# EAGLE board iPod-Serial-v14 (EAGLE 7.2.0)
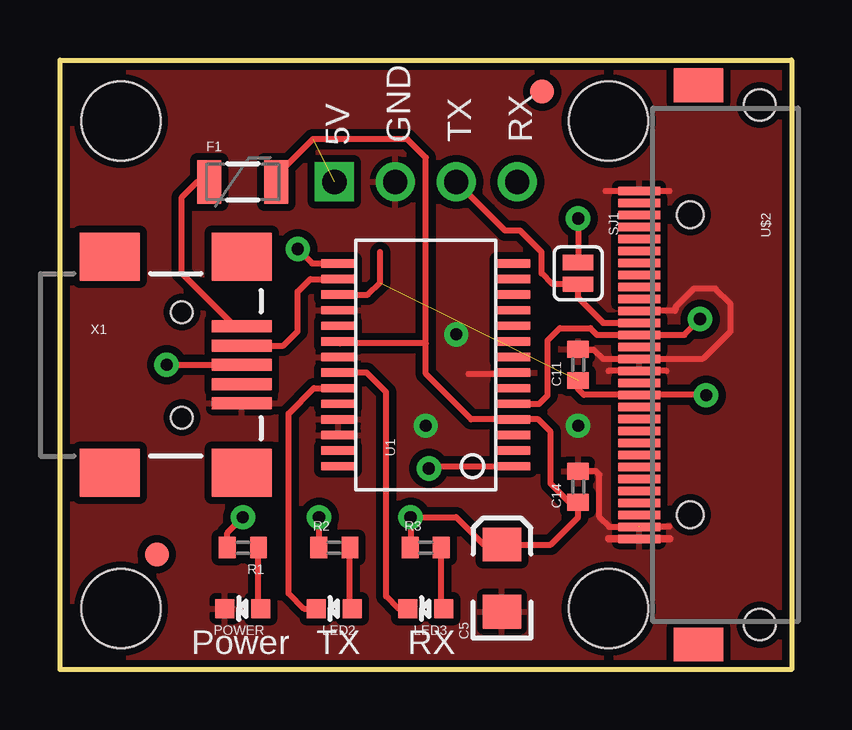
[diagram p0: board, top side]
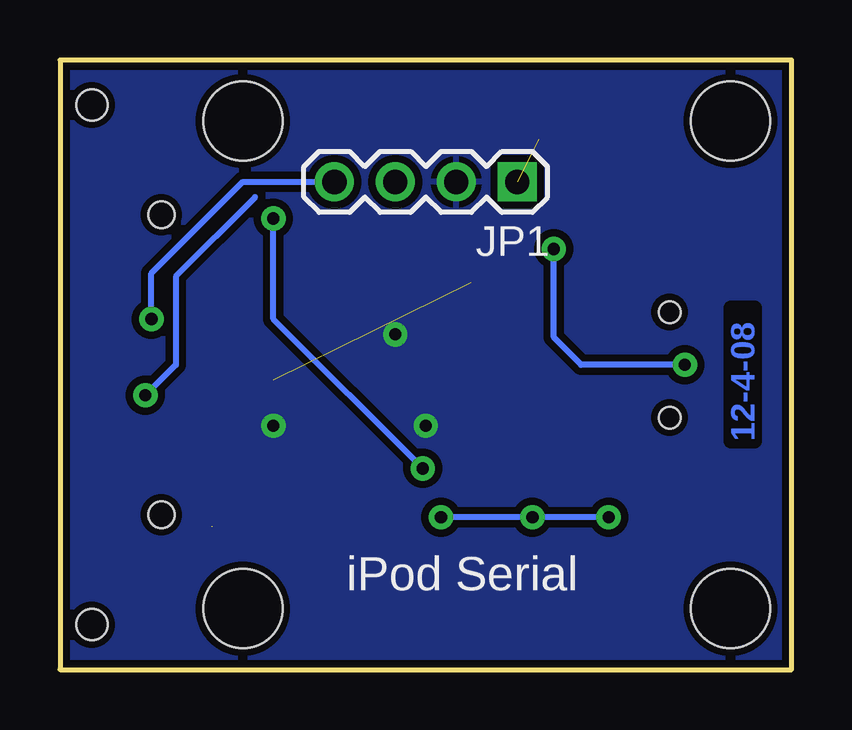
[diagram p1: board, bottom side, seen from below]

Size 30.48 x 25.4 mm. Coordinates in mm from the lower left corner, seen from the top.
Outline: 0,25.4 30.48,25.4 30.48,0 0,0 0,25.4
Copper layers (1*16): Top 0.035mm / dielectric 1.5mm / Bottom 0.035mm
Design rules "SparkFun *": minimum track width 8mil, minimum drill 20mil, track to track 8mil, track to pad 8mil, pad to pad 8mil, via to via 8mil, smd to smd 8mil, copper to edge 10mil, drill to drill 8mil, minimum pad ring 12mil, minimum via ring 10mil, stop-mask expansion 4mil, vias tented up to drill 25mil, thermal gap 10mil
Net classes: 0 default: width 0.203 mm; 1 vcc: width 0.203 mm

## Footprints (pad centres in the part's own frame; a part is rotated, then mirrored left to right if it is on the bottom)
EIA3216 = smd 1.4 x 1.6: A 1.4,0; C -1.4,0
C0402 = smd 0.7 x 0.9: 1 -0.65,0; 2 0.65,0
PTC-1206 = smd 1 x 1.8: 1 -1.4,0; 2 1.4,0
1X04 = drill 1.016 square: 1 0,0 | drill 1.016: 2 2.54,0; 3 5.08,0; 4 7.62,0
LED-0603 = smd 0.8 x 0.8: A 0,-0.75; C 0,0.75
SJ_2S = smd 0.635 x 1.27: 1 -0.45,0; 2 0.45,0
SSOP28DB = smd 0.348 x 1.397: 1 -4.225,-3.656; 2 -3.575,-3.656; 3 -2.925,-3.656; 4 -2.275,-3.656; 5 -1.625,-3.656; 6 -0.975,-3.656; 7 -0.325,-3.656; 8 0.325,-3.656; 9 0.975,-3.656; 10 1.625,-3.656; 11 2.275,-3.656; 12 2.925,-3.656; 13 3.575,-3.656; 14 4.225,-3.656; 15 4.225,3.656; 16 3.575,3.656; 17 2.925,3.656; 18 2.275,3.656; 19 1.625,3.656; 20 0.975,3.656; 21 0.325,3.656; 22 -0.325,3.656; 23 -0.975,3.656; 24 -1.625,3.656; 25 -2.275,3.656; 26 -2.925,3.656; 27 -3.575,3.656; 28 -4.225,3.656
STAND-OFF = hole 3.302: 0,0
IPOD_FEMALE_CONNECTOR = smd 0.35 x 1.75: 1 -7.25,0; 2 -6.75,0; 3 -6.25,0; 4 -5.75,0; 5 -5.25,0; 6 -4.75,0; 7 -4.25,0; 8 -3.75,0; 9 -3.25,0; 10 -2.75,0; 11 -2.25,0; 12 -1.75,0; 13 -1.25,0; 14 -0.75,0; 15 -0.25,0; 16 0.25,0; 17 0.75,0; 18 1.25,0; 19 1.75,0; 20 2.25,0; 21 2.75,0; 22 3.25,0; 23 3.75,0; 24 4.25,0; 25 4.75,0; 26 5.25,0; 27 5.75,0; 28 6.25,0; 29 6.75,0; 30 7.25,0 | smd 1.4 x 2.05: 31 -11.65,2.475; 32 11.65,2.475 | hole 1.1: 6.25,2.125; -6.25,2.125 | hole 1.3: 10.825,5.025; -10.825,5.025
FIDUCIAL-1X2 = smd 1 x 1: 1 0,0
USB-MINIB = smd 2.5 x 0.5: D+ 2.5,0; D- 2.5,0.8; GND 2.5,-1.6; ID 2.5,-0.8; VBUS 2.5,1.6 | smd 2.5 x 2: GND@1 -3,-4.5; GND@2 -3,4.5; GND@3 2.5,4.5; GND@4 2.5,-4.5 | hole 0.9: 0,2.2; 0,-2.2

## Placement (x,y rotation side)
C5  10uF  [EIA3216]  18.41,3.81 90 top
C11  0.1uF  [C0402]  21.59,12.7 90 top
C14  0.1uF  [C0402]  21.59,7.62 90 top
F1  500mA-PTC  [PTC-1206]  7.62,20.32 0 top
JP1  [1X04]  11.43,20.32 180 bottom
LED2  Red  [LED-0603]  11.43,2.54 90 top
LED3  Green  [LED-0603]  15.24,2.54 90 top
POWER  Red  [LED-0603]  7.62,2.54 90 top
R1  330  [C0402]  7.62,5.08 180 top
R2  1K  [C0402]  11.43,5.08 0 top
R3  1K  [C0402]  15.24,5.08 0 top
SJ1  SOLDERJUMPERNC2  [SJ_2S]  21.59,16.51 270 top
U1  FT232RL-BASICSSOP  [SSOP28DB]  15.24,12.7 90 top
U$1  STAND-OFF  [STAND-OFF]  2.54,22.86 0 top
U$2  IPOD_CONNECTOR_FEMALE  [IPOD_FEMALE_CONNECTOR]  24.13,12.7 270 top
U$4  FIDUCIAL1X2  [FIDUCIAL-1X2]  4.04,4.8 0 top
U$5  STAND-OFF  [STAND-OFF]  22.86,22.86 0 top
U$6  STAND-OFF  [STAND-OFF]  2.54,2.54 0 top
U$7  STAND-OFF  [STAND-OFF]  22.86,2.54 0 top
U$8  FIDUCIAL1X2  [FIDUCIAL-1X2]  20.09,24.08 0 top
U$9  CREATIVE_COMMONS  [CREATIVE_COMMONS]  20.32,-8.89 0 top  (outside the outline)
X1  USBSMD  [USB-MINIB]  5.08,12.7 0 top

## Library data of the parts
C5 C11 C14 F1 JP1 LED2 LED3 POWER R1-R3 SJ1 U1 U$1 U$2 U$4-U$9 X1 = SparkFun

## Nets
3.3V [vcc]: C11.1 U1.17 U$2.18
5V [vcc]: C5.A C14.1 F1.2 JP1.1 R1.2 R2.1 R3.1 U1.4 U1.20
GND [vcc]: C5.C C11.2 C14.2 JP1.2 POWER.C U1.7 U1.18 U1.21 U1.25 U1.26 U$2.1 U$2.11 U$2.15 U$2.16 U$2.29 U$2.30 X1.GND
N$1: POWER.A R1.1
N$2: U1.15 X1.D+
N$3: LED2.A R2.2
N$4: LED3.A R3.2
N$6: U1.16 X1.D-
RXLED: LED3.C U1.22
TXD: JP1.3 SJ1.2 U$2.12
TXLED: LED2.C U1.23
USB-RX: JP1.4 U1.5 U$2.13
USB-TX: SJ1.1 U1.1
USBVCC [vcc]: F1.1 X1.VBUS

## Tracks (layer width: path | path; a pad name or v marks a point on that pad's centre or on a via)
3.3V  (via drill 0.51)  (1 unrouted)
  Top 0.254: 13.34,17.4 13.34,16.13 12.83,15.62 U1.17 | C11.1 21.59,11.68 21.82,11.45 U$2.18 26.9,11.45 v26.92,11.43
  Bottom 0.254: 22.35,19.68 25.65,16.38 25.65,12.7 v26.92,11.43
5V  (via drill 0.51)  (1 unrouted)
  Top 0.254: F1.2 9.02,20.58 10.54,22.1 14.48,22.1 15.24,21.34 15.24,13.59 | R1.2 6.97,5.7 v7.62,6.35 | R3.1 14.61,5.08 v14.61,6.35 16.51,6.35 17.65,5.21 C5.A 20.45,5.21 21.59,6.35 C14.1 21.22,6.97 20.45,7.75 20.45,9.91 19.94,10.41 19.93,10.43 U1.4 17.13,10.43 15.24,12.32 15.24,13.59 | R2.1 10.78,6.33 v10.79,6.35 | U1.20 11.67,13.59 15.24,13.59
  Bottom 0.254: v7.62,6.35 v10.79,6.35 v14.61,6.35
GND  (via drill 0.51)  (1 unrouted)
  Top 0.254: C14.2 21.61,8.26 22.35,8.26 22.48,8.13 22.48,6.35 22.88,5.95 U$2.29 | U$2.15 | U$2.15 22.61,12.95 22.23,13.34 21.59,13.34 C11.2 | U1.7 18.84,12.32 17.02,12.32 | U$2.11 25.62,14.95 25.65,14.99 25.65,15.11 26.42,15.88 27.3,15.88 27.94,15.24 27.94,14.1 26.8,12.95 U$2.15 | 24.13,5.97 25.4,5.97 | 25.27,12.45 22.86,12.45 | 25.4,19.94 22.73,19.94
  Top 0.305: 22.86,5.46 25.4,5.46
  other vias: 21.59,10.16 16.51,13.97 15.24,10.16
  pour Top (isolate 0.305): 0,0 0,25.4 30.48,25.4 30.48,0
  pour Bottom (isolate 0.305): 0,0 0,25.4 30.48,25.4 30.48,0
N$1
  Top 0.254: POWER.A 8.38,2.54 8.27,2.65 R1.1
N$2  (via drill 0.51)
  Top 0.254: v4.45,12.7 X1.D+ | U1.15 10.51,16.93 v9.91,17.53
  Bottom 0.254: v4.45,12.7 8.76,12.7 9.91,13.84 v9.91,17.53
N$3
  Top 0.254: LED2.A 12.19,2.54 12.08,2.65 R2.2
N$4
  Top 0.254: LED3.A 16,2.54 15.89,2.65 R3.2
N$6
  Top 0.254: X1.D- 9.31,13.5 9.91,14.1 9.91,15.75 10.43,16.27 U1.16
RXLED
  Top 0.254: LED3.C 14.1,2.54 13.59,3.05 13.59,11.56 12.77,12.38 U1.22
TXD
  Top 0.254: JP1.3 18.54,18.29 19.18,18.29 20.07,17.4 20.07,16.51 20.52,16.06 SJ1.2 21.59,15.49 22.63,14.45 U$2.12
TXLED
  Top 0.254: LED2.C 10.16,2.54 9.53,3.17 9.53,10.67 10.58,11.72 U1.23
USB-RX  (via drill 0.51)
  Top 0.254: U1.5 19.96,11.07 20.32,11.43 20.32,13.72 20.83,14.22 22.1,14.22 22.37,13.95 U$2.13 26.02,13.95 v26.67,14.61
  Bottom 0.254: JP1.4 22.86,20.32 26.67,16.51 v26.67,14.61
USB-TX  (via drill 0.51)
  Top 0.254: v21.59,18.8 SJ1.1 | U1.1 15.46,8.47 v15.37,8.38
  Bottom 0.254: v21.59,18.8 21.59,14.61 v15.37,8.38
USBVCC
  Top 0.254: X1.VBUS 7.29,14.3 5.08,16.51 5.08,19.68 5.71,20.32 F1.1 6.35,20.32

## Text on the board
Bottom: 12-4-08
tPlace: 5V | GND | TX | RX | Power | TX | RX
bPlace: iPod Serial